# EAGLE board Board (EAGLE 9.6.2)
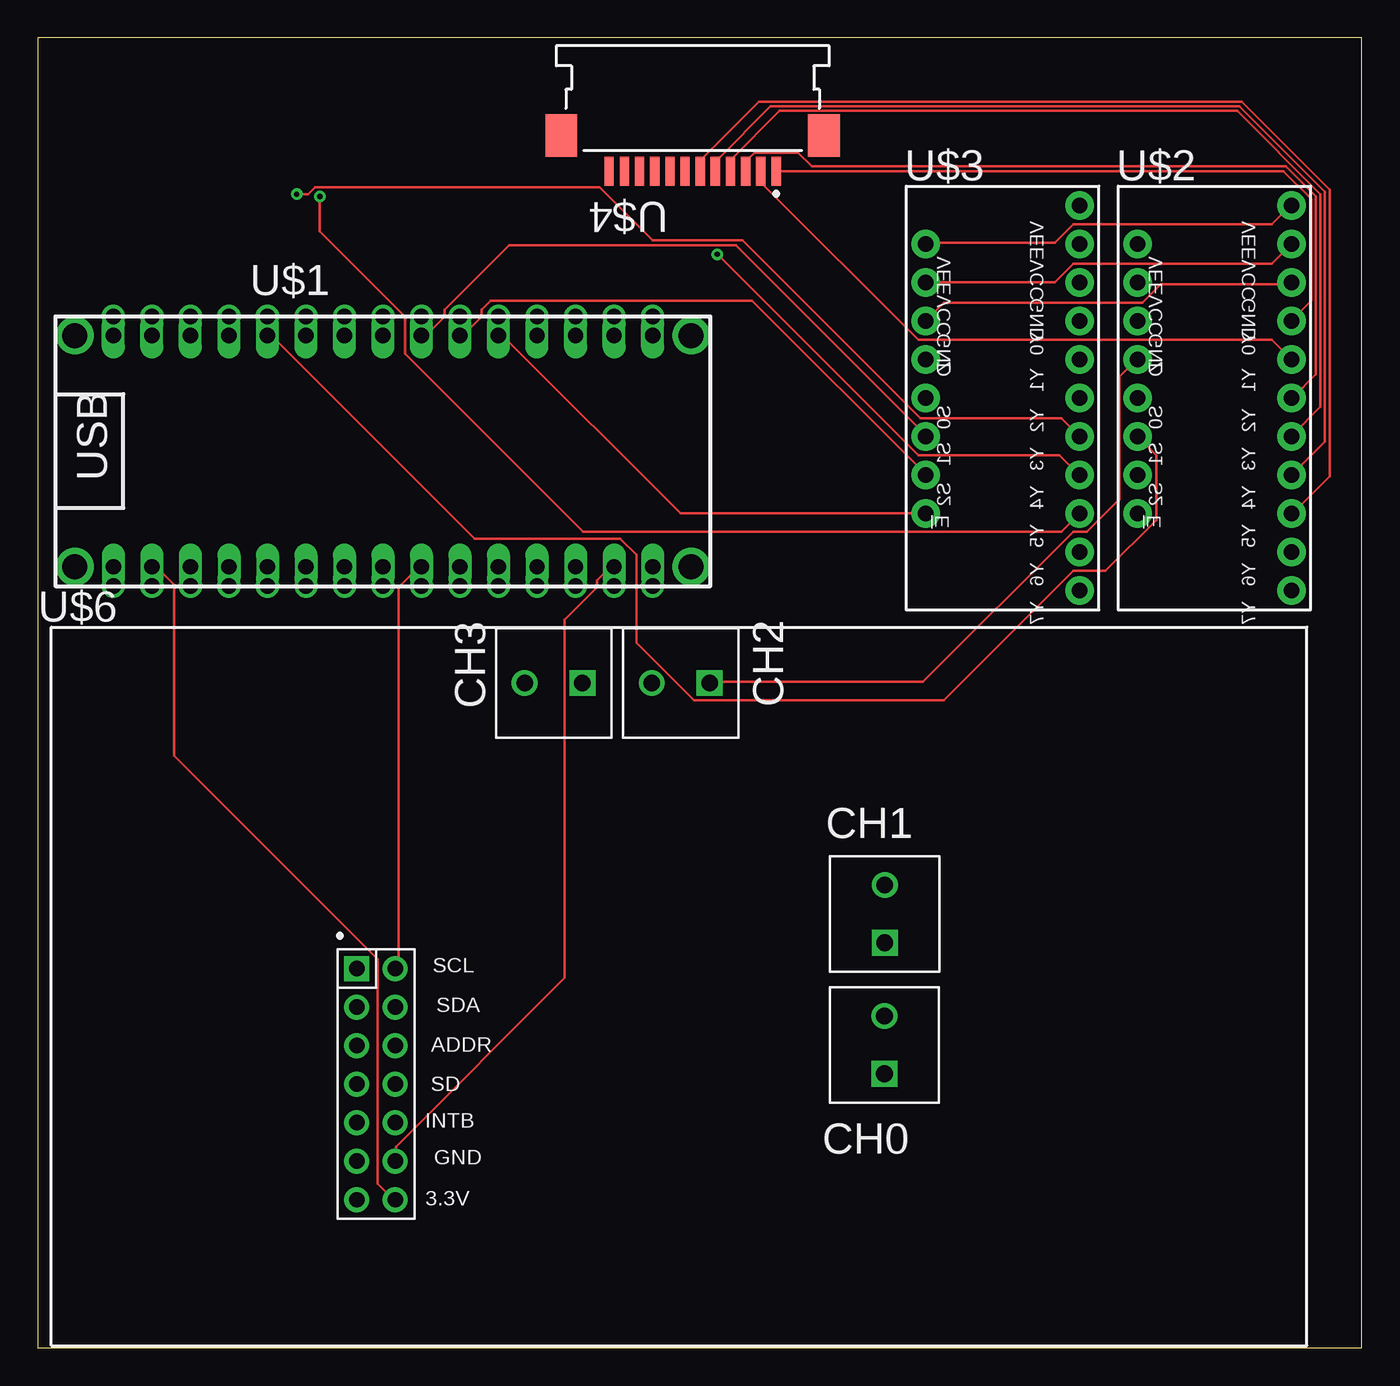
[diagram p0: board, top side]
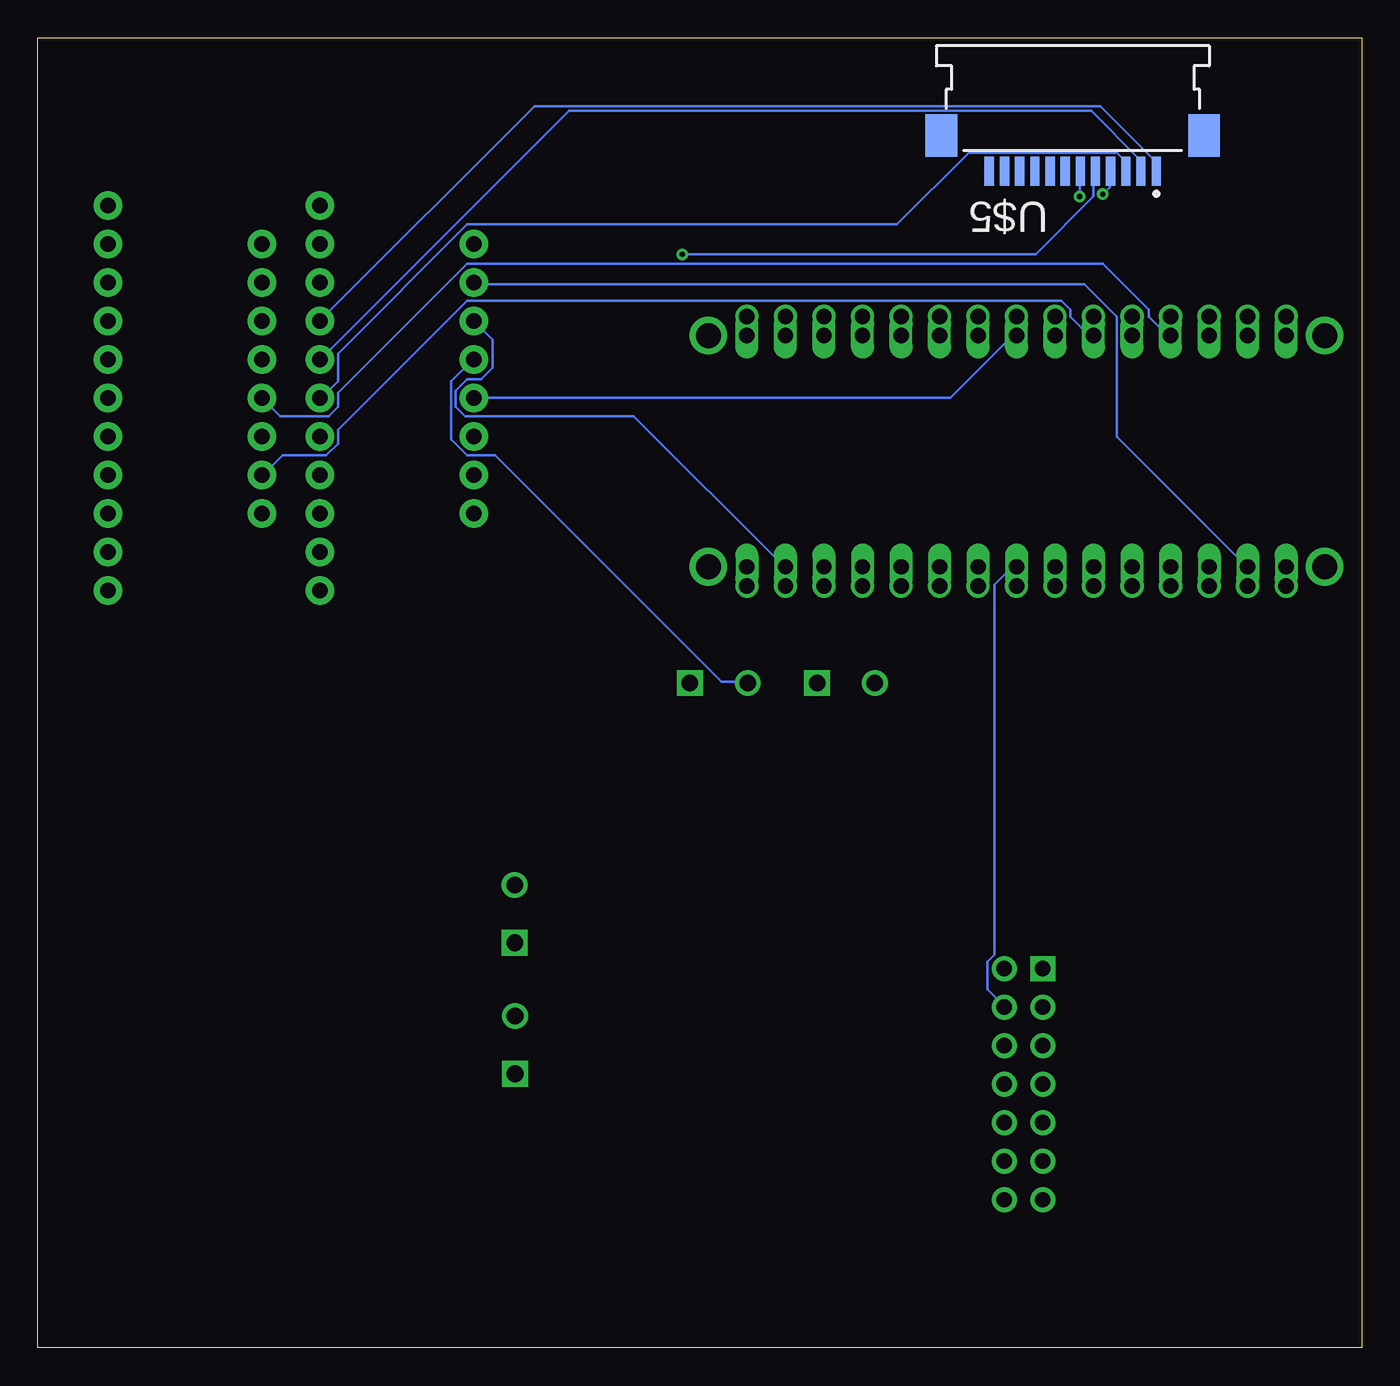
[diagram p1: board, bottom side, seen from below]

Size 87.3 x 86.35 mm. Coordinates in mm from the lower left corner, seen from the top.
Outline: 0,0 87.3,0 87.3,86.35 0,86.35 0,0
Copper layers (1*16): Top 0.035mm / dielectric 1.5mm / Bottom 0.035mm
Design rules "default": minimum track width 6mil, minimum drill 0.35mm, track to track 6mil, track to pad 6mil, pad to pad 6mil, via to via 6mil, smd to smd 6mil, copper to edge 40mil, drill to drill 6mil, minimum pad ring 10mil, minimum via ring 8mil, stop-mask expansion 4mil, vias tented up to drill 0mil, thermal gap 10mil

## Footprints (pad centres in the part's own frame; a part is rotated, then mirrored left to right if it is on the bottom)
BLE33 = drill 1.016 pad 1.524 long: 3.3V -12.802,-8.204; 5V 12.598,-8.204; A0 -7.722,-8.204; A1 -5.182,-8.204; A2 -2.642,-8.204; A3 -0.102,-8.204; A6 7.518,-8.204; A7 10.058,-8.204; AREF -10.262,-8.204; D2 10.058,7.036; D3 7.518,7.036; D4 4.978,7.036; D5 2.438,7.036; D6 -0.102,7.036; D7 -2.642,7.036; D8 -5.182,7.036; D9 -7.722,7.036; D10 -10.262,7.036; D11 -12.802,7.036; D12 -15.342,7.036; GND1 17.678,-8.204; GND2 12.598,7.036; RESET 15.138,-8.204; RESET2 15.138,7.036; RX 17.678,7.036; SCK -15.342,-8.204; SCL 4.978,-8.204; SDA 2.438,-8.204; TX 20.218,7.036; VIN 20.218,-8.204 | drill 1.016 pad 1.016: 31 -15.342,8.306; 32 20.218,-9.474; 34 -12.802,8.306; 35 17.678,-9.474; 37 -10.262,8.306; 38 15.138,-9.474; 40 -7.722,8.306; 41 12.598,-9.474; 43 -5.182,8.306; 44 10.058,-9.474; 45 -2.642,8.306; 46 7.518,-9.474; 47 -0.102,8.306; 48 4.978,-9.474; 49 2.438,8.306; 50 2.438,-9.474; 51 4.978,8.306; 52 -0.102,-9.474; 53 7.518,8.306; 54 -2.642,-9.474; 55 10.058,8.306; 56 -5.182,-9.474; 57 12.598,8.306; 58 -7.722,-9.474; 59 15.138,8.306; 60 -10.262,-9.474; 61 17.678,8.306; 62 -12.802,-9.474; 63 20.218,8.306; 64 -15.342,-9.474 | drill 1.651 pad 1.651: 33 -17.882,7.036; 36 -17.882,-8.204; 39 22.758,-8.204; 42 22.758,7.036
MUX = drill 1.016 pad 1.88: E -4.953,-7.239; GND 5.207,8.001; GND2 -4.953,5.461; S0 -4.953,0.381; S1 -4.953,-2.159; S2 -4.953,-4.699; VCC 5.207,10.541; VCC2 -4.953,8.001; VEE 5.207,13.081; VEE2 -4.953,10.541; Y0 5.207,5.461; Y1 5.207,2.921; Y2 5.207,0.381; Y3 5.207,-2.159; Y4 5.207,-4.699; Y5 5.207,-7.239; Y6 5.207,-9.779; Y7 5.207,-12.319; Z -4.953,2.921
MOLEX = smd 0.61 x 1.905: 1 -5.512,3.708; 2 -4.496,3.708; 3 -3.505,3.708; 4 -2.489,3.708; 5 -1.499,3.708; 6 -0.508,3.708; 7 0.508,3.708; 8 1.499,3.708; 9 2.489,3.708; 10 3.505,3.708; 11 4.496,3.708; 12 5.512,3.708 | smd 2.108 x 2.794: 13 -8.661,1.372; 14 8.661,1.372
FDC2214 = drill 1.016 pad 1.651 square: 2 -22.149,-0.406 | drill 1.016 pad 1.651: 3.3V -19.609,-15.646; 11 -22.149,-2.946; 13 -22.149,-5.486; 15 -22.149,-8.026; 17 -22.149,-10.566; 19 -22.149,-13.106; 21 -22.149,-15.646; ADDR -19.609,-5.486; GND -19.609,-13.106; INTB -19.609,-10.566; SCL -19.609,-0.406; SD -19.609,-8.026; SDA -19.609,-2.946 | drill 1.092 pad 1.702: CH0_A 12.649,-3.531; CH1_A 12.675,5.105; CH2_A -2.692,18.415; CH3_A -11.074,18.415 | drill 1.092 pad 1.702 square: CH0_B 12.649,-7.341; CH1_B 12.675,1.295; CH2_B 1.118,18.415; CH3_B -7.264,18.415

## Placement (x,y rotation side)
U$1  BLE33BLE33  [BLE33]  20.32,59.69 0 top
U$2  MUXMUX  [MUX]  77.47,62.23 0 top
U$3  MUXMUX  [MUX]  63.5,62.23 0 top
U$4  MOLEXMOLEX  [MOLEX]  43.18,81.28 180 top
U$5  MOLEXMOLEX  [MOLEX]  19.05,81.28 180 bottom
U$6  FDC2214FDC2214  [FDC2214]  43.18,25.4 0 top

## Library data of the parts
U$1 = BLE33_EAGLE
U$2 U$3 = MUX_eagle
U$4 U$5 = mOLEX_EAGLE
U$6 = fdc2214_EAGLE

## Nets
N$1: U$2.Y0 U$4.1
N$2: U$2.Y1 U$4.2
N$3: U$2.Y2 U$4.3
N$4: U$2.Y3 U$4.4
N$5: U$2.Y4 U$4.5
N$6: U$2.Y5 U$4.6
N$7: U$3.Y0 U$5.1
N$8: U$3.Y1 U$5.2
N$9: U$3.Y2 U$5.3
N$10: U$3.Y3 U$5.4
N$11: U$3.Y4 U$5.5
N$12: U$3.Y5 U$5.6
N$14: U$3.Z U$6.CH2_A
N$15: U$2.Z U$6.CH2_B
N$16: U$1.SCL U$6.SCL
N$17: U$1.SDA U$6.SDA
N$18: U$1.D2 U$3.E
N$19: U$1.D3 U$3.S2
N$20: U$1.3.3V U$2.VCC U$3.VCC2 U$6.3.3V
N$22: U$1.D4 U$3.S1
N$23: U$1.D5 U$3.S0
N$25: U$1.D7 U$2.S2
N$26: U$1.D8 U$2.S1
N$27: U$1.D9 U$2.S0
N$28: U$2.VEE U$3.VEE2
N$30: U$1.GND1 U$2.GND U$3.GND2 U$6.GND

## Tracks (layer width: path | path; a pad name or v marks a point on that pad's centre or on a via)
N$1
  Top 0.152: U$4.1 82.14,77.57 83.97,75.74 83.97,69.04 82.75,67.82 U$2.Y0
N$2
  Top 0.152: U$2.Y1 81.38,66.45 58.06,66.45 47.7,76.81 47.7,77.57 U$4.2
N$3
  Top 0.152: U$4.3 46.79,77.57 46.79,78.33 47.24,78.79 50.14,78.79 51.05,77.88 82.3,77.88 84.28,75.89 84.28,64.16 82.75,62.64 U$2.Y2
N$4
  Top 0.152: U$4.4 45.72,77.57 45.72,78.33 48.92,81.53 79.1,81.53 84.58,76.05 84.58,62.03 82.75,60.2 U$2.Y3
N$5
  Top 0.152: U$2.Y4 84.89,59.74 84.89,76.2 79.25,81.84 48.31,81.84 44.81,78.33 44.81,77.57 U$4.5
N$6
  Top 0.152: U$4.6 43.74,77.57 43.74,78.33 47.55,82.14 79.4,82.14 85.19,76.35 85.19,57.45 82.75,55.02 U$2.Y5
N$7
  Bottom 0.152: U$3.Y0 54.56,81.84 17.22,81.84 13.56,78.18 13.56,77.57 U$5.1
N$8
  Bottom 0.152: U$5.2 14.63,77.57 14.63,78.33 17.83,81.53 52.27,81.53 68.58,65.23 U$3.Y1
N$9
  Bottom 0.152: U$5.3 15.54,78.18 16.15,78.79 25.91,78.79 30.63,74.07 58.98,74.07 67.51,65.53 67.51,63.7 68.58,62.64 U$3.Y2
N$10  (via drill 0.35)
  Top 0.152: v17.07,76.05 17.83,76.05 18.29,76.5 37.03,76.5 40.54,73 46.48,73 58.22,61.27 67.51,61.27 U$3.Y3
  Bottom 0.152: v17.07,76.05 16.61,76.5 16.61,77.57 U$5.4
N$11  (via drill 0.35)
  Top 0.152: v44.81,72.08 58.06,58.83 67.36,58.83 68.58,57.61 U$3.Y4
  Bottom 0.152: v44.81,72.08 21.49,72.08 17.68,75.89 17.68,77.57 U$5.5
N$12  (via drill 0.35)
  Top 0.152: v18.59,75.89 18.59,73.61 24.23,67.97 24.23,65.53 35.97,53.8 67.51,53.8 U$3.Y5
  Bottom 0.152: v18.59,75.89 18.59,77.57 U$5.6
N$14
  Bottom 0.152: U$6.CH2_A 40.54,43.89 42.22,43.89 57.15,58.83 58.98,58.83 60.05,59.89 60.05,63.7 58.67,65.08 U$3.Z
N$15
  Top 0.152: U$6.CH2_B 44.35,43.89 58.37,43.89 68.28,53.8 69.19,53.8 71.32,55.93 71.32,64.01 72.39,65.08 U$2.Z
N$16
  Top 0.152: U$1.SCL 25.3,51.36 24.99,51.36 23.77,50.14 23.77,25.15 23.62,24.99 U$6.SCL
N$17
  Bottom 0.152: U$1.SDA 22.86,51.36 23.16,51.36 24.23,50.29 24.23,25.91 24.69,25.45 24.69,23.62 23.62,22.55 U$6.SDA
N$18
  Top 0.152: U$1.D2 30.48,66.6 30.79,66.6 42.37,55.02 58.52,55.02 U$3.E
N$19
  Top 0.152: U$1.D3 27.89,66.75 28.04,66.75 29.26,67.97 29.26,68.43 29.87,69.04 47.09,69.04 58.52,57.61 U$3.S2
N$20
  Top 0.152: U$2.VCC 81.38,71.48 68.28,71.48 67.06,70.26 58.67,70.26 U$3.VCC2 | U$1.3.3V 7.62,51.36 7.92,51.36 8.99,50.29 8.99,39.01 22.4,25.6 22.4,10.82 23.47,9.75 U$6.3.3V
  Bottom 0.152: U$3.VCC2 58.52,70.1 18.29,70.1 16.15,67.97 16.15,60.05 7.62,51.51 U$1.3.3V
N$22
  Top 0.152: U$1.D4 25.3,66.75 25.6,66.75 26.82,67.97 26.82,68.43 31.09,72.69 46.02,72.69 58.52,60.2 U$3.S1
N$23
  Bottom 0.152: U$1.D5 22.86,66.6 23.16,66.6 27.13,62.64 58.52,62.64 U$3.S0
N$25
  Bottom 0.152: U$1.D7 17.68,66.75 17.98,66.75 19.2,67.97 19.2,68.43 19.81,69.04 58.98,69.04 67.51,60.5 67.51,59.59 68.28,58.83 71.17,58.83 72.39,57.61 U$2.S2
N$26
  Top 0.152: U$2.S1 73.76,58.83 73.76,54.56 70.41,51.21 68.28,51.21 59.74,42.67 43.28,42.67 39.47,46.48 39.47,52.27 38.41,53.34 28.8,53.34 15.54,66.6 15.24,66.6 U$1.D8
N$27
  Bottom 0.152: U$2.S0 71.32,61.42 68.12,61.42 67.51,62.03 67.51,62.94 58.98,71.48 17.07,71.48 14.02,68.43 14.02,67.97 12.8,66.75 12.65,66.75 U$1.D9
N$28
  Top 0.152: U$3.VEE2 58.67,72.85 67.06,72.85 68.28,74.07 81.38,74.07 82.6,75.29 U$2.VEE
N$30
  Top 0.152: U$6.GND 23.62,12.34 23.62,13.26 34.75,24.38 34.75,48.01 36.88,50.14 36.88,50.6 37.64,51.36 37.95,51.36 U$1.GND1 | U$3.GND2 59.74,68.89 72.85,68.89 74.07,70.1 82.6,70.1 U$2.GND
  Bottom 0.152: U$3.GND2 57.3,66.45 57.3,64.62 58.06,63.86 58.98,63.86 59.74,63.09 59.74,62.03 59.13,61.42 48.01,61.42 38.1,51.51 U$1.GND1